# Altium PCB PCB1.PcbDoc (part 1 of 2)
Units mil, origin at the board's own origin, x right, y up, seen from the top; angles counter-clockwise.
Board outline 3865 x 2500 mil, 4 copper layers (Top Layer, GND, Power, Bottom Layer), stack 23.756 mil thick; 61 components, 57 nets, 224 pads, 39 vias.
Unrouted connection lines stored in the file: 58.
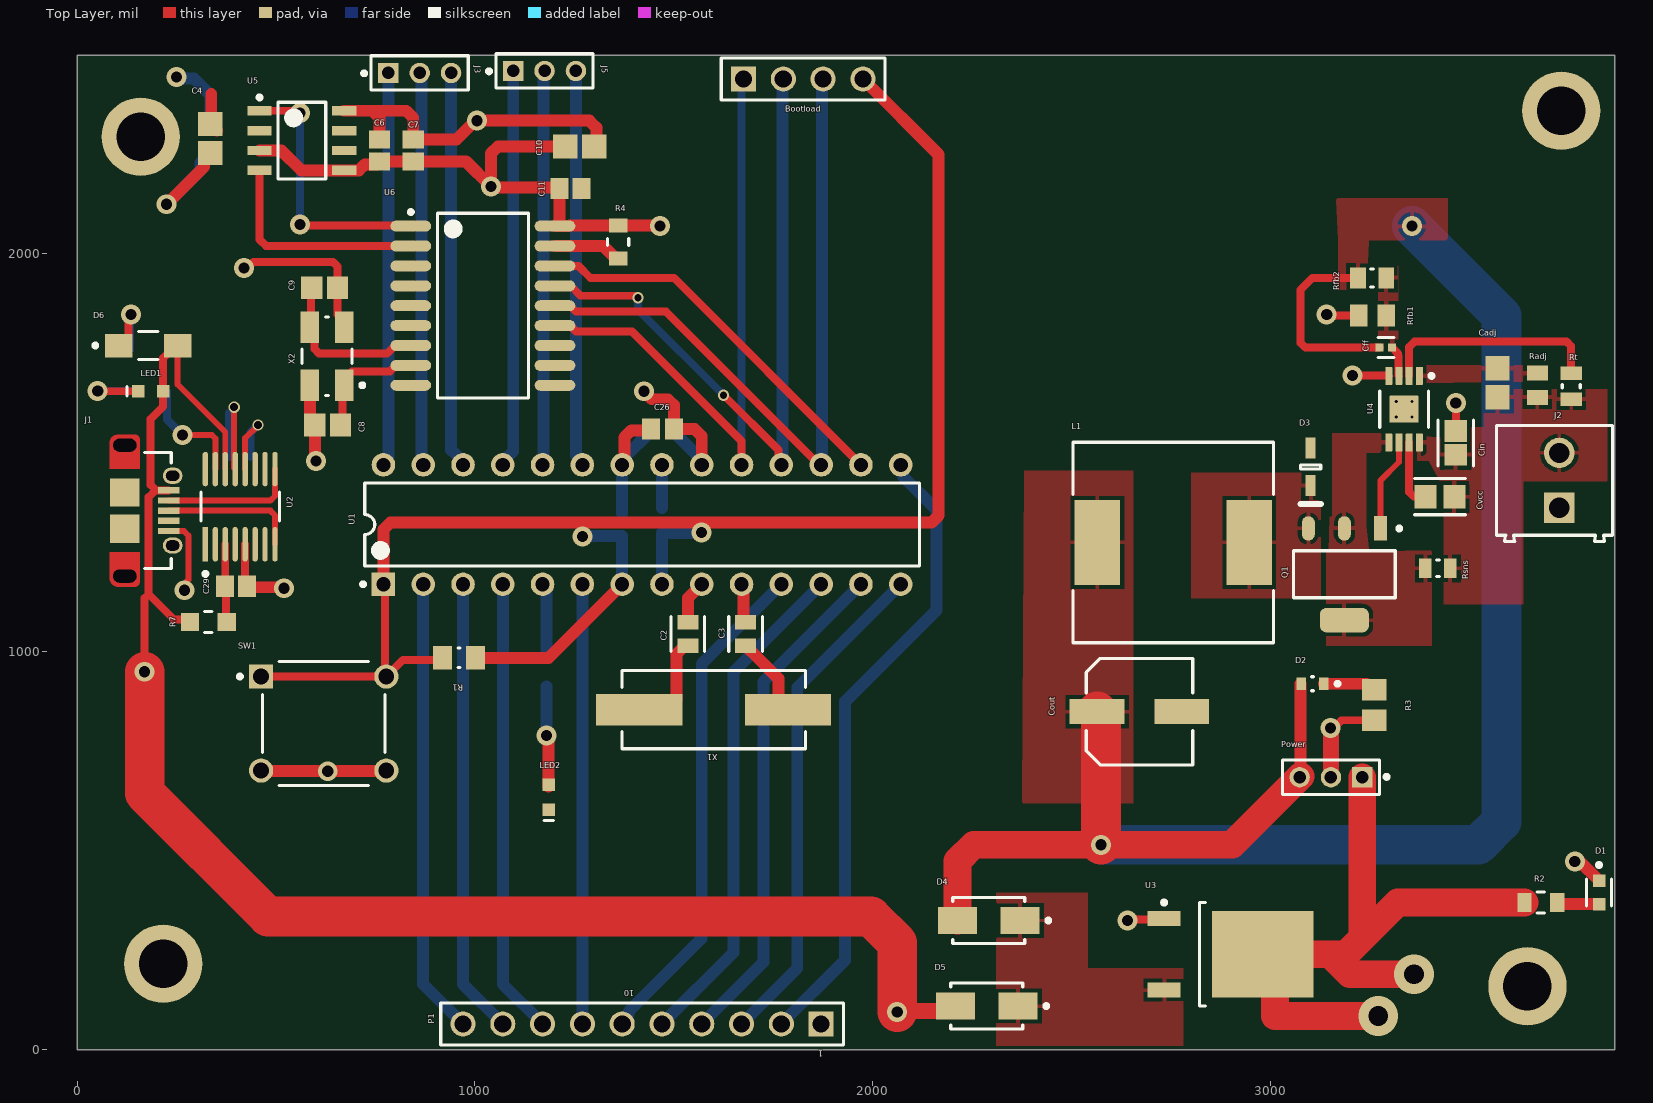
[diagram p0: Top Layer view]
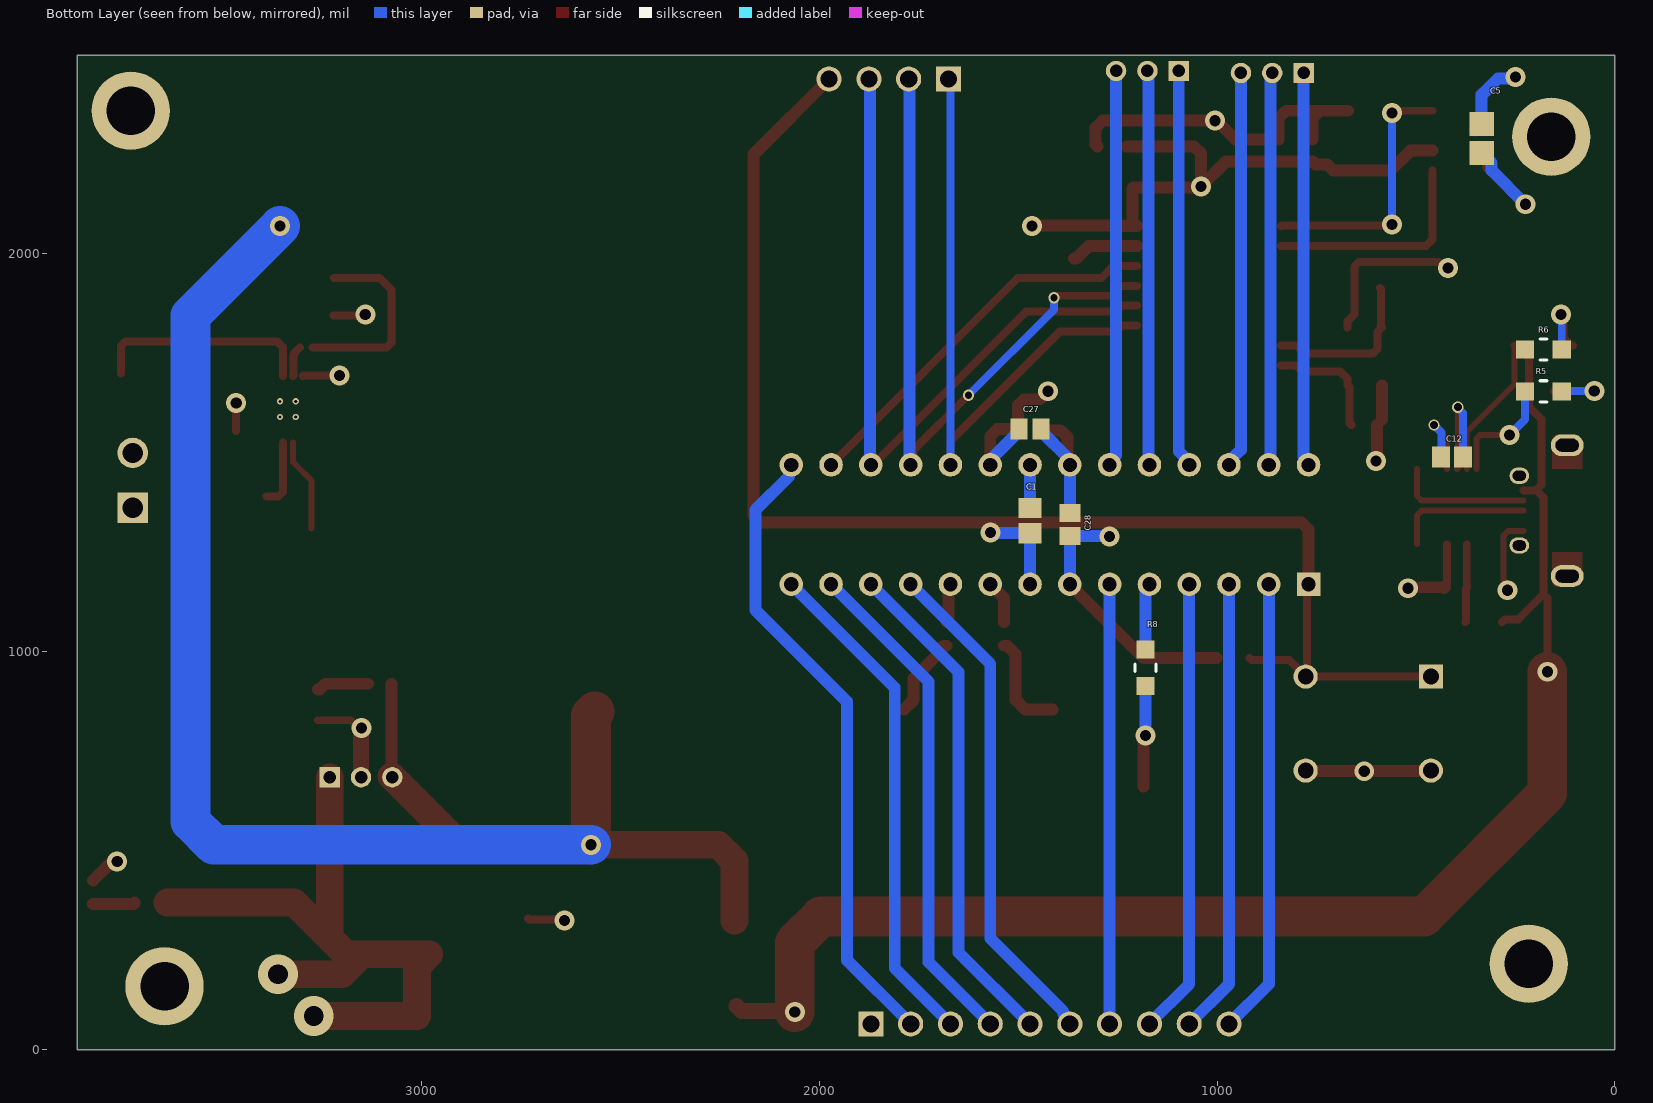
[diagram p1: Bottom Layer view, seen from below]
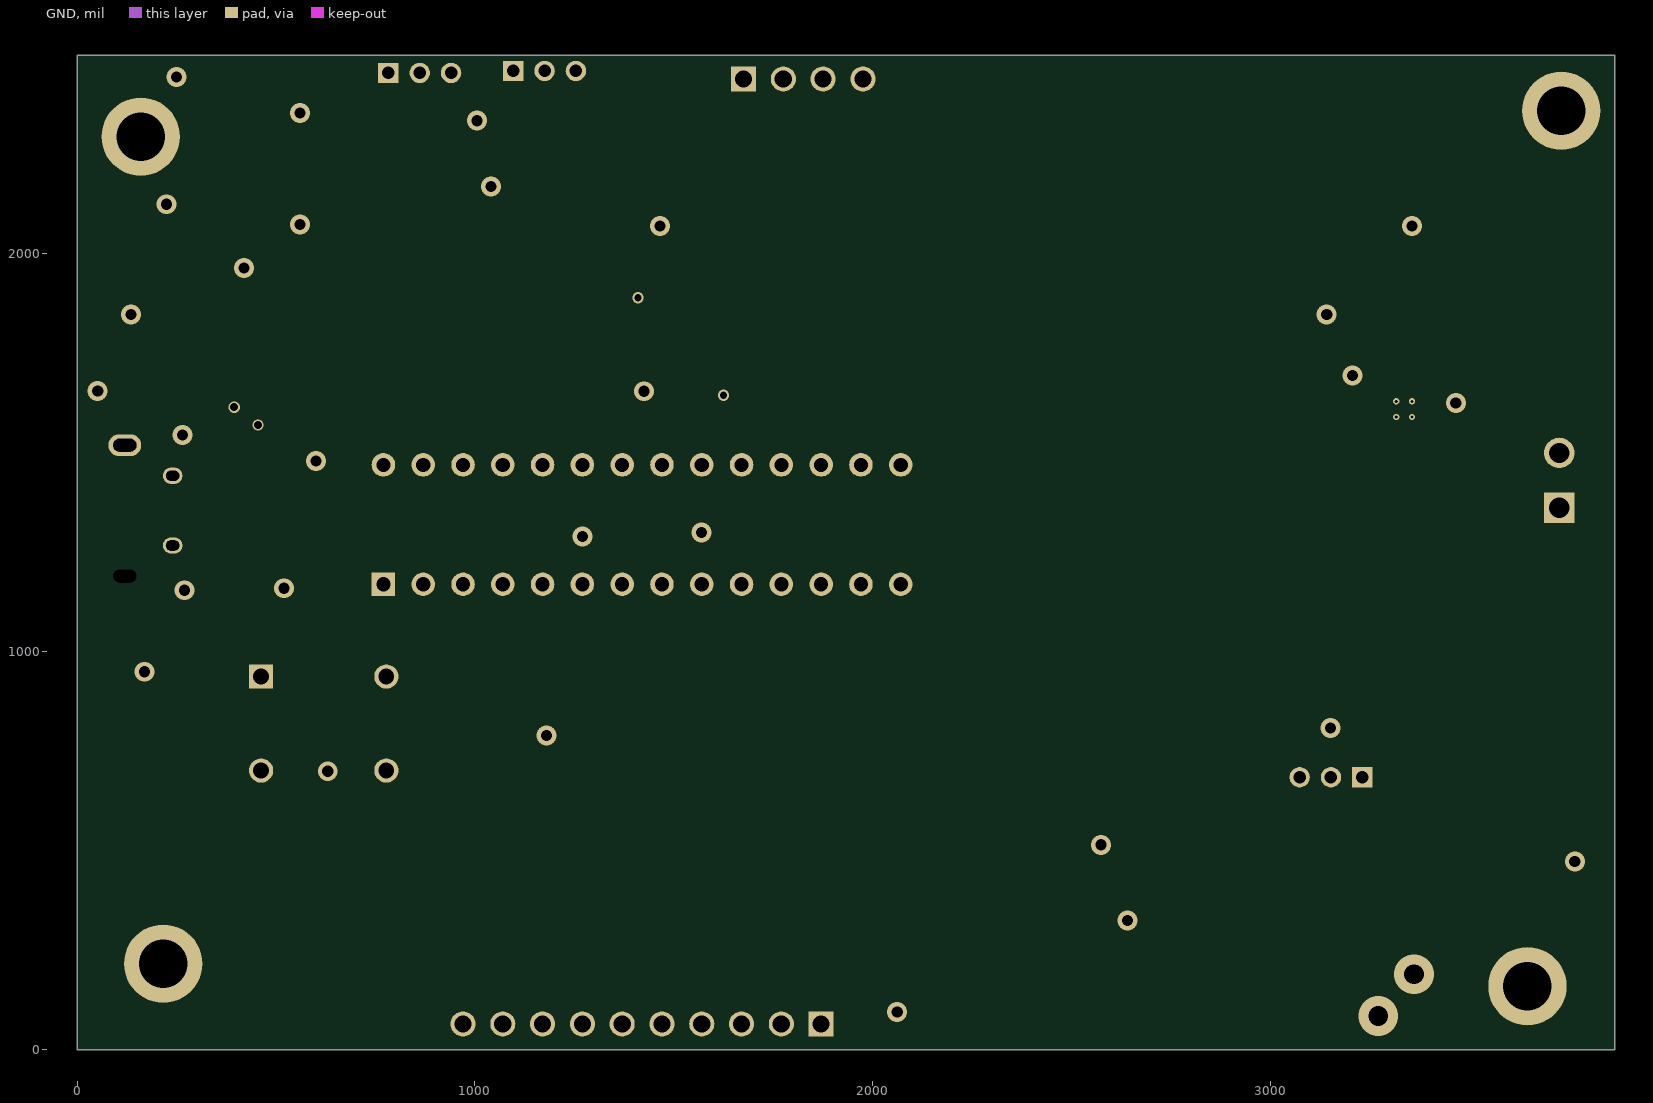
[diagram p2: GND]
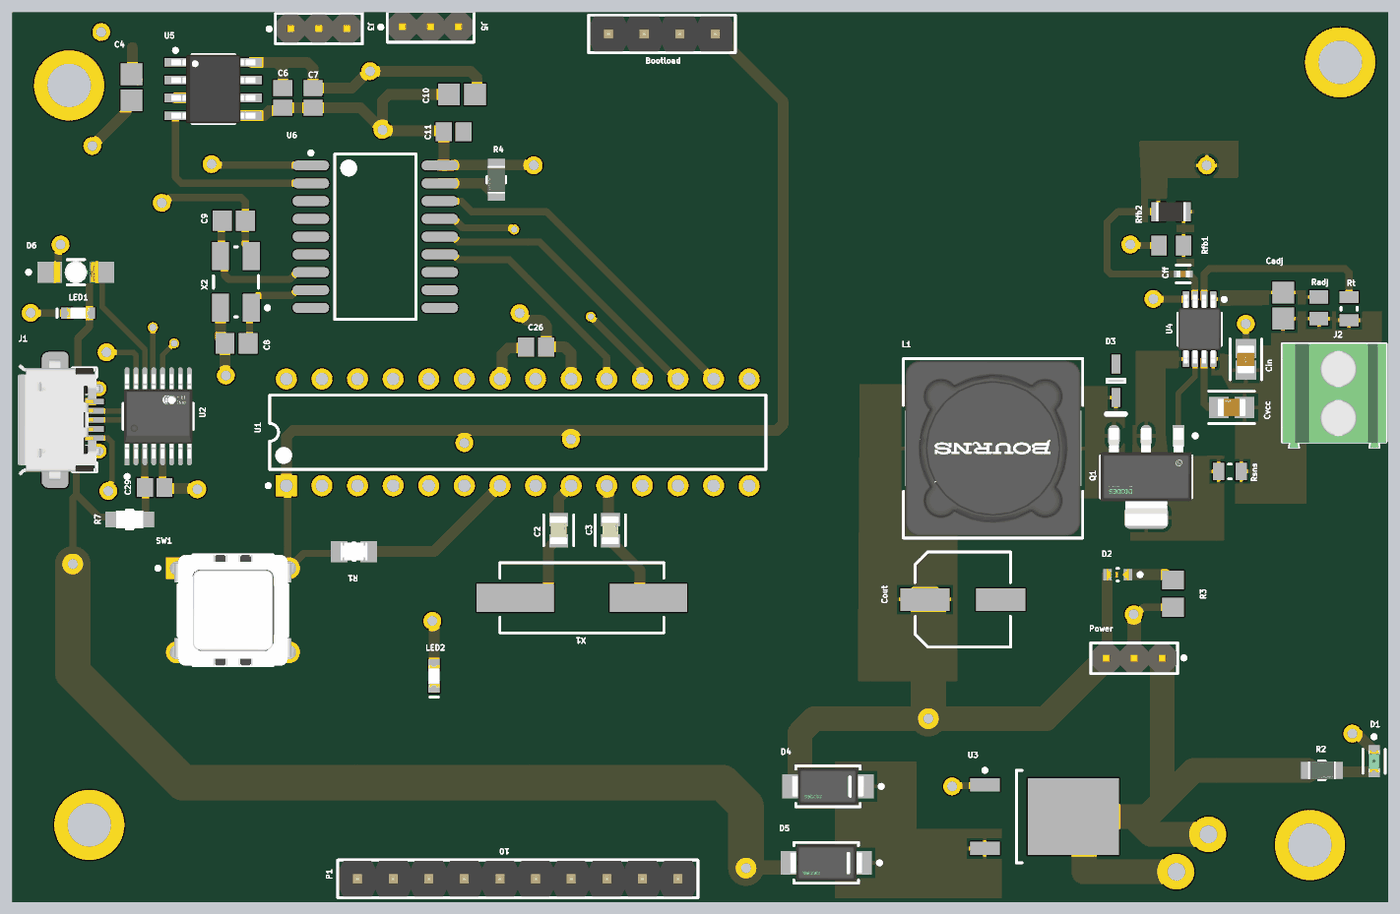
[diagram p3: 3D render of the assembled board from above, using the file's embedded part models]

## Layer stack, top to bottom
Top Solder: solder mask 0.4, Solder Resist, Dk 3.5
Top Layer: signal copper 1.4
Dielectric 2: prepreg 2.8, PP-006, Dk 4.1
GND: signal copper 1.378
Dielectric 1: dielectric 12.6, FR-4, Dk 4.8
Power: signal copper 1.378
Dielectric 3: prepreg 2.8, PP-006, Dk 4.1
Bottom Layer: signal copper 1.4
Bottom Solder: solder mask 0.4, Solder Resist, Dk 3.5

## Board outline
0,0 3865,0 3865,2500 0,2500

## Design rules (kind name [scope] priority, off if disabled: settings)
Clearance [All] p1: gap=10 ignorepadtopadclearanceinfootprint=FALSE except(0: Arc-Hole Track-Hole SMDPad-Hole THPad-Hole Via-Hole Fill-Hole Poly-Hole Region-Hole Text-Hole)
PolygonConnect [All] p1: connectstyle=Relief reliefconductorwidth=10 reliefentries=4 polygonreliefangle="90 Angle" airgapwidth=10
RoomDefinition "Power Delivery" [InComponentClass('Power Delivery')] p1: confinementstyle=ConfineIn formatcopy=TRUE lockcomponents=FALSE outline 4919.57,-1000 4919.57,4775 4289.57,4775 4289.57,-1000
RoomDefinition Peripherals [InComponentClass('Peripherals')] p2: confinementstyle=ConfineIn formatcopy=TRUE lockcomponents=FALSE outline 10356.42,1370 13636.42,1370 13636.42,1990 10356.42,1990
RoomDefinition Microcontroller [InComponentClass('Microcontroller')] p3: confinementstyle=ConfineIn formatcopy=TRUE lockcomponents=FALSE outline 7111.1,-1000 13551.1,-1000 13551.1,530 7111.1,530
RoutingVias [All] p1: holewidth=28 width=50 viastyle="Through Hole" minholewidth=28 minwidth=50 maxholewidth=28 maxwidth=50
SolderMaskExpansion [All] p1: expansion=4 istentingtop=FALSE
Width [All] p1: maxlimit=100 minlimit=10 preferedwidth=20 minimp=50.000000 maximp=50.000000 favimp=50.000000
30 further rules are at their usual default settings.

## Classes and differential pairs
component class "Power Delivery": Cadj Cff Cin Cout Cvcc D1 D2 D3 D4 D5 L1 Power Q1 R2 R3 Radj Rfb1 Rfb2 Rsns Rt U3 U4
component class Peripherals: C4 C5 C6 C7 C8 C9 C10 C11 J4 R4 U5 U6 X2
component class Microcontroller: Bootload C1 C2 C3 C12 C26 C27 C28 C29 D6 J1 J2 J3 J5 LED1 LED2 P1 R1 R5 R6 R7 R8 SW1 U1 U2 X1

## Components (designator, comment, footprint, x,y, rotation, side; value= is the part's Value field where it differs from the comment)
Bootload "61300411121" 61300411121 1825,2440 r0 top
C1 "100nF" CAPC2013X140X50NL20T25 1470,1330 r90 bottom
C2 "22pF" FP-C0805C-DN-MFG 1535,1045 r270 top value="22 pF"
C3 "22pF" FP-C0805C-DN-MFG 1680,1045 r270 top value="22 pF"
C4 "100nF" CAPC2013X94X50ML20T25 335,2290 r270 top
C5 "100nF" CAPC2013X94X50ML20T25 335,2290 r270 bottom
C6 "10uF" CAPC2013X115X51LL20T26 760,2260 r270 top
C7 "10uF" CAPC2013X115X51LL20T26 845,2260 r270 top
C8 "15pF" CAPC2013X94X50NL20T25 630,1570 r180 top
C9 "15pF" CAPC2013X94X50NL20T25 622.52,1915 r180 top
C10 "100nF" CAPC2013X94X50ML20T25 1263.58,2270 r180 top
C11 "10uF" CAPC2013X115X51LL20T26 1240,2165 r180 top
C12 "10uF" CAPC2013X115X51LL20T26 410,1490 r0 bottom
C26 "1uF" CAPC2013X94X50LL20T25 1471.46,1560 r0 top
C27 "4.7uF" CAPC2013X140X50LL20T25 1470,1560 r0 bottom
C28 "1uF" CAPC2013X94X50LL20T25 1370,1320 r270 bottom
C29 "10uF" CAPC2013X115X51LL20T26 400,1165 r180 top
Cadj "1nF, 50V" CAPC2013X94X50ML20T25 3570,1676.42 r90 top
Cff "1.1nF, 0402" FP-C0402-BB-MFG 3289.25,1765 r0 top value="1,100 pF"
Cin "2.2uF, 35V" FP-C2012-125-0_2-IPC_B 3465,1525.08 r90 top
Cout "33uF" NIC-CAPA2-6.3X5.8_V 2670,850 r0 top
Cvcc "470nF, 50V" FP-GCM21B-0_15-IPC_A 3425,1390 r180 top
D1 "Blue" FP-LTST-C191TBKT-MFG 3825,395.47 r270 top
D2 "Green" FP-6_541-5056_01-4-MFG 3105,920 r180 top
D3 "750mV" DIOD-SOD-323-2_V 3100,1465 r270 top
D4 "B330A-13-F" FP-SMA-MFG 2291.26,325 r180 top value=200pF
D5 "B330A-13-F" FP-SMA-MFG 2286.26,110 r180 top value=200pF
D6 "Green" FP-APTD3216CGCK-MFG 178.82,1770 r0 top
J1 "Micro-USB" 629105150921 120,1355 r270 top
J2 "" 691214110002 3713.19,1431.1 r90 top
J3 "951103-8622-AR" FP-951103-8622-AR-MFG#1 861.26,2455 r0 top
J4 "" 691214110002 13146.42,1730 r0 top
J5 "951103-8622-AR" FP-951103-8622-AR-MFG#2 1175,2460 r0 top
L1 "27uH, Shielded" FP-SRR1260-MFG 2755,1275 r180 top value=27uH
LED1 "Red" 0603_A 185,1655 r0 top
LED2 "Red" 0603_A 1185,635 r90 top
P1 "61301011121" 61301011121 1420,65 r180 top
Power "951103-8622-AR" FP-951103-8622-AR-MFG#2 3151.26,685 r180 top
Q1 "60V, 3A" FP-SOT223-IPC_C 3185,1195 r270 top
R1 "10K" FP-CRCW0805-e3-IPC_A 960,985 r0 top
R2 "120" FP-AC0805-MFG 3678.66,370 r0 top value=120Ω
R3 "180" RESC2013X70X40ML20T20 3260,866.61 r270 top
R4 "10k" FP-AC0805-MFG 1360,2030 r270 top value=10KΩ
R5 "180" FP-CR0805-MFG 180,1655 r180 bottom
R6 "180" FP-CR0805-MFG 180,1760 r180 bottom
R7 "180" FP-CR0805-MFG 330,1075 r180 top
R8 "180" FP-CR0805-MFG 1180,960 r270 bottom
Radj "665" RESC2013X70X40LL20T20 3670,1670 r270 top
Rfb1 "3.32k" RESC2013X55X40NL15T20 3255.55,1845 r0 top
Rfb2 "10k" RESC2013X60X35NL10T20 3254.57,1940 r180 top
Rsns "10m" RESC2013X60X35LL10T20 3420,1210 r0 top
Rt "44.2k" RESC2013X50X30LL20T20 3755,1667.48 r270 top
SW1 "Reset" FP-ESE-20C421-MFG 620,820 r0 top
U1 "ATmega328-PU" 28P3 1420,1320 r90 top
U2 "FT230XS-R" FP-SSOP-16-MFG 410,1365 r90 top
U3 "" TO-252_N 2899.29,240 r0 top
U4 "LM25085MYE/NOPB" DGN0008A_L 3335,1610 r270 top
U5 "MCP2551-I/SN" MCHP-SN8_V 565,2285 r0 top
U6 "MCP2515-E/SO" SOIC-SO18_M 1020,1870 r0 top
X1 "16MHz" FOX-FOXSDLF160-20_V 1600,855 r180 top
X2 "20MHz" TXC-7B-4_V 628.31,1742.83 r90 top

## Footprints (in the part's own frame and the unit in brackets; to place one, negate y for a bottom-side part, rotate by r counter-clockwise, add the part's x,y. Pads: shape width x height; smd on the part's side, far side on the other; paste and mask are expansions set on the pad)
28P3 [mm] "28-Pin Plastic Dual In-Line Package (PDIP)"
  rect 1.5x1.5 hole 0.9: 1(-3.81,16.51)
  round 1.5 hole 0.9: 2(-3.81,13.97) 3(-3.81,11.43) 4(-3.81,8.89) 5(-3.81,6.35) 6(-3.81,3.81) 7(-3.81,1.27) 8(-3.81,-1.27) 9(-3.81,-3.81) 10(-3.81,-6.35) 11(-3.81,-8.89) 12(-3.81,-11.43) 13(-3.81,-13.97) 14(-3.81,-16.51) 15(3.81,-16.51) 16(3.81,-13.97) 17(3.81,-11.43) 18(3.81,-8.89) 19(3.81,-6.35) 20(3.81,-3.81) 21(3.81,-1.27) 22(3.81,1.27) 23(3.81,3.81) 24(3.81,6.35) 25(3.81,8.89) 26(3.81,11.43) 27(3.81,13.97) 28(3.81,16.51)
  silkscreen extent -3.93,-17.7 2.65,17.93, body extent -3.6,-17.65 3.6,17.65, height 4.58
0603_A [mm] "Chip LED, 2-Leads, Body 1.6x0.8mm, IPC Medium Density"
  rect 0.8x0.8 smd: 1(-0.8,0) 2(0.8,0)
  silkscreen extent -1.5,-0.3 -1.5,0.3, body extent -0.8,-0.4 0.8,0.4, height 0.7
61300411121 [mm] "Pin Header, pitch 2.54 mm, THT, Vertical, single row, 4p"
  rect 1.6x1.6 hole 1.1: 1(-3.81,0)
  round 1.6 hole 1.1: 2(-1.27,0) 3(1.27,0) 4(3.81,0)
  silkscreen extent -5.23,-1.35 5.23,1.35, body extent -5.08,-1.27 5.08,1.27, height 8.57
61301011121 [mm] "Pin Header, pitch 2.54 mm, THT, Vertical, single row, 10p"
  rect 1.6x1.6 hole 1.1: 1(-11.43,0)
  round 1.6 hole 1.1: 2(-8.89,0) 3(-6.35,0) 4(-3.81,0) 5(-1.27,0) 6(1.27,0) 7(3.81,0) 8(6.35,0) 9(8.89,0) 10(11.43,0)
  silkscreen extent -12.85,-1.35 12.85,1.35, body extent -12.7,-1.27 12.7,1.27, height 8.57
629105150921 [mm] "Micro USB 2.0 Type AB Horizontal"
  rect 0.4x1.35 smd: 1(-1.3,2.805) 2(-0.65,2.805) 3(0,2.805) 4(0.65,2.805) 5(1.3,2.805)
  round 0 / inner oval 1.4x2.1 / far side oval 1.4x2.1 hole 0.825 slot 1.5 at 90 deg mask+0.102: Shell(-4.175,0)
  oval 1.05x1.25 hole 0.65 slot 0.85 at 90 deg: Shell(-2.225,3.055) Shell(2.225,3.055)
  rect 1.8x1.9 smd: Shell(-1.15,0) Shell(1.15,0)
  round 0 / inner round 0 / far side oval 1.4x2.1 hole 0.825 slot 1.5 at 90 deg mask+0.102: Shell(4.175,0)
  Top Layer region: 4.353,-0.95 4.544,-0.912 4.706,-0.804 4.814,-0.641 4.852,-0.45 4.852,-0.45 4.852,0.65 4.83,0.765 4.765,0.862 4.667,0.927 4.553,0.95 4.553,0.95 2.668,0.95 2.668,-0.95
  Top Layer region: -4.353,-0.95 -4.544,-0.912 -4.706,-0.804 -4.814,-0.641 -4.852,-0.45 -4.852,-0.45 -4.852,0.65 -4.83,0.765 -4.765,0.862 -4.667,0.927 -4.553,0.95 -4.553,0.95 -2.668,0.95 -2.668,-0.95
  silkscreen extent -3.7,1.25 3.7,2.97, body extent -4.3,-2.64 4.3,3.23, height 2.76
691214110002 [mm] "3.50 mm Horizontal Entry Modular, 2p"
  rect 1.95x1.95 hole 1.3: 1(-1.75,-0.3)
  round 1.95 hole 1.3: 2(1.75,-0.3)
  silkscreen extent -3.9,-3.7 3.5,3.7, body extent -3.95,-3.7 3.5,3.7, height 8.55
CAPC2013X94X50LL20T25 [mm] "Chip Capacitor, 2-Leads, Body 2.01x1.25mm, IPC High Density"
  rect 1.15x1.35 smd: 1(-0.725,0) 2(0.725,0)
  body extent -1.1,-0.72 1.1,0.72, height 0.94
CAPC2013X94X50ML20T25 [mm] "Chip Capacitor, 2-Leads, Body 2.01x1.25mm, IPC Low Density"
  rect 1.55x1.55 smd: 1(-0.925,0) 2(0.925,0)
  body extent -1.1,-0.72 1.11,0.72, height 0.94
CAPC2013X94X50NL20T25 [mm] "Chip Capacitor, 2-Leads, Body 2.01x1.25mm, IPC Medium Density"
  rect 1.35x1.45 smd: 1(-0.825,0) 2(0.825,0)
  body extent -1.1,-0.72 1.11,0.72, height 0.94
CAPC2013X115X51LL20T26 [mm] "Chip Capacitor, 2-Leads, Body 2.01x1.25mm, IPC High Density"
  rect 1.15x1.35 smd: 1(-0.7,0) 2(0.7,0)
  body extent -1.11,-0.72 1.1,0.72, height 1.15
CAPC2013X140X50LL20T25 [mm] "Chip Capacitor, 2-Leads, Body 2.00x1.25mm, IPC High Density"
  rect 1.1x1.35 smd: 1(-0.7,0) 2(0.7,0)
  body extent -1.1,-0.72 1.1,0.72, height 1.4
CAPC2013X140X50NL20T25 [mm] "Chip Capacitor, 2-Leads, Body 2.00x1.25mm, IPC Medium Density"
  rect 1.3x1.45 smd: 1(-0.8,0) 2(0.8,0)
  body extent -1.1,-0.72 1.1,0.72, height 1.4
DGN0008A_L [mm] "TSOP, 8-Leads, Body 3.1x3.1mm, Pitch 0.65mm, Thermal Pad 1.85x1.73mm, IPC High Density"
  rrect22% 1.15x0.45 smd: 1(-2.125,0.975) 2(-2.125,0.325) 3(-2.125,-0.325) 4(-2.125,-0.975) 5(2.125,-0.975) 6(2.125,-0.325) 7(2.125,0.325) 8(2.125,0.975)
  rrect6% 1.73x1.85 smd: 9(0,0)
  silkscreen extent -2.25,-1.55 1.15,1.88, body extent -2.45,-1.5 2.45,1.5, height 0.94
DIOD-SOD-323-2_V [mm] "SOD323, 2-Leads, Body 1.7x1.3mm"
  rect 1.35x0.65 smd: 1(-1.2,0) 2(1.2,0)
  silkscreen extent -0.13,-0.65 2.37,0.65, body extent -0.85,-0.65 0.85,0.65, height 1.17
FOX-FOXSDLF160-20_V [mm] "SMD, 2-Leads, Body 5x11.7mm, Height 4.5mm"
  rect 5.5x2 smd: 1(-4.75,0) 2(4.75,0)
  silkscreen extent -5.85,-2.5 5.85,2.5, body extent -5.85,-2.5 5.85,2.5, height 4.5
FP-6_541-5056_01-4-MFG [mm]
  rect 0.6x0.8 smd paste+0 mask+0: 1(-0.725,0) 2(0.725,0)
  silkscreen extent -1.73,-0.45 0.05,0.45, body extent -1.12,-0.55 1.12,0.55, height 0.25
FP-951103-8622-AR-MFG#1 [mm]
  rect 1.3x1.3 hole 0.8: 1(-2,0)
  round 1.3 hole 0.8 paste-1000 mask+0: 2(0,0) 3(2,0)
  silkscreen extent -3.67,-1.1 3.1,1.1, body extent -3.2,-1.2 3.2,1.2, height 0.25
FP-951103-8622-AR-MFG#2 [mm]
  rect 1.3x1.3 hole 0.8 paste-1000 mask+0: 1(-2,0)
  round 1.3 hole 0.8 paste-1000 mask+0: 2(0,0) 3(2,0)
  silkscreen extent -3.67,-1.1 3.1,1.1, body extent -3.2,-1.2 3.2,1.2, height 0.25
FP-AC0805-MFG [mm]
  rect 0.9x1.2 smd paste+0 mask+0: 1(-1.05,0) 2(1.05,0)
  silkscreen extent -0.23,-0.67 0.23,0.67, body extent -1.6,-0.77 1.6,0.77, height 0.25
FP-APTD3216CGCK-MFG [mm]
  rect 1.75x1.5 smd paste+0 mask+0: 1(-1.875,0) 2(1.875,0)
  silkscreen extent -3.5,-0.9 0.63,0.9, body extent -2.85,-1 2.85,1, height 0.25
FP-C0402-BB-MFG [mm]
  rect 0.52x0.52 smd paste+0 mask+0: 1(-0.4,0) 2(0.4,0)
  silkscreen extent -0.5,-0.64 0.5,0.64, body extent -0.8,-0.4 0.8,0.4, height 0.25
FP-C0805C-DN-MFG [mm]
  rect 0.95x1.35 smd paste+0 mask+0: 1(-0.75,0) 2(0.75,0)
  silkscreen extent -1.1,-1.07 1.1,1.07, body extent -1.4,-0.85 1.4,0.85, height 0.25
FP-C2012-125-0_2-IPC_B [mil]
  rect 54.25x57.33 smd paste+0 mask+0: 1(-30.08,0) 2(30.08,0)
  silkscreen extent -57,-44 57,44, body extent -67,-39 67,39, height 10
FP-CR0805-MFG [mm]
  rect 1.15x1.15 smd paste+0 mask+0: 1(-1.175,0) 2(1.175,0)
  silkscreen extent -0.23,-0.67 0.23,0.67, body extent -1,-0.63 1,0.62, height 0.6
FP-CRCW0805-e3-IPC_A [mil]
  rect 47.5x59.38 smd paste+0 mask+0: 1(-41.37,0) 2(41.37,0)
  silkscreen extent -3,-25 3,25, body extent -39,-25 39,25, height 20
FP-ESE-20C421-MFG [mm]
  rect 1.55x1.55 hole 1 paste-1000 mask+0: a(-4,3)
  round 1.55 hole 1 paste-1000 mask+0: b(-4,-3) c(4,3) d(4,-3)
  silkscreen extent -5.47,-3.95 3.9,3.95, body extent -4.87,-4.05 4.87,4.05, height 0.25
FP-GCM21B-0_15-IPC_A [mil]
  rect 55.34x59.38 smd paste+0 mask+0: 1(-36.47,0) 2(36.47,0)
  silkscreen extent -64,-45 64,45, body extent -84,-49 84,49, height 10
FP-LTST-C191TBKT-MFG [mm]
  rect 0.8x0.8 smd paste+0 mask+0: 1(-0.75,0) 2(0.75,0)
  silkscreen extent -1.87,-0.8 0.85,0.8, body extent -1.25,-0.55 1.25,0.55, height 0.25
FP-SMA-MFG [mm]
  rect 2.5x1.7 smd paste+0 mask+0: 1(-2,0) 2(2,0)
  silkscreen extent -3.93,-1.46 2.3,1.46, body extent -3.35,-1.56 3.35,1.56, height 0.25
FP-SOT223-IPC_C [mm]
  rect 1.56x0.832 smd paste+0 mask+0: 1(-2.926,2.3)
  rrect100% 1.56x0.832 smd paste+0 mask+0: 2(-2.926,0) 3(-2.926,-2.3)
  rrect53% 1.56x3.132 smd paste+0 mask+0: 4(2.926,0)
  silkscreen extent -3.05,-3.25 1.5,3.63, body extent -3.81,-3.35 3.81,3.35, height 0.25
FP-SRR1260-MFG [mm]
  rect 2.9x5.4 smd paste+0 mask+0: 1(-4.85,0) 2(4.85,0)
  silkscreen extent -6.4,-6.4 6.4,6.4, body extent -6.5,-6.5 6.5,6.5, height 0.25
FP-SSOP-16-MFG [mm]
  rect 2.2x0.345 smd paste+0 mask+0: 1(-2.4,2.222)
  rrect100% 2.2x0.345 smd paste+0 mask+0: 2(-2.4,1.587) 3(-2.4,0.952) 4(-2.4,0.317) 5(-2.4,-0.318) 6(-2.4,-0.953) 7(-2.4,-1.588) 8(-2.4,-2.222) 9(2.4,-2.222) 10(2.4,-1.587) 11(2.4,-0.952) 12(2.4,-0.317) 13(2.4,0.318) 14(2.4,0.953) 15(2.4,1.588) 16(2.4,2.222)
  silkscreen extent -4.42,-2.5 0.92,2.5, body extent -3.6,-2.75 3.6,2.75, height 0.25
MCHP-SN8_V [mm] "SOIC, 8-Leads, Body 4.9x3.9mm, Pitch 1.27mm"
  rect 1.55x0.6 smd: 1(-2.7,1.905) 2(-2.7,0.635) 3(-2.7,-0.635) 4(-2.7,-1.905) 5(2.7,-1.905) 6(2.7,-0.635) 7(2.7,0.635) 8(2.7,1.905)
  silkscreen extent -2.82,-2.45 1.53,2.88, body extent -3,-2.45 3,2.45, height 1.75
NIC-CAPA2-6.3X5.8_V [mm] "Aluminum Electrolytic Capacitor, Diameter 6.3mm, Height 6.1mm, Pitch 5.4mm"
  rect 3.5x1.6 smd: 1(-2.7,0) 2(2.7,0)
  silkscreen extent -3.4,-3.4 3.4,3.4, body extent -3.14,-3.12 3.14,3.15, height 6.1
RESC2013X50X30LL20T20 [mm] "Chip Resistor, 2-Leads, Body 2.00x1.25mm, IPC High Density"
  rect 0.85x1.35 smd: 1(-0.825,0) 2(0.825,0)
  silkscreen extent -0.1,-0.58 0.1,0.58, body extent -1.1,-0.72 1.1,0.72, height 0.5
RESC2013X55X40NL15T20 [mm] "Chip Resistor, 2-Leads, Body 2.00x1.25mm, IPC Medium Density"
  rect 1.1x1.4 smd: 1(-0.875,0) 2(0.875,0)
  body extent -1.07,-0.7 1.08,0.7, height 0.55
RESC2013X60X35LL10T20 [mm] "Chip Resistor, 2-Leads, Body 2.00x1.25mm, IPC High Density"
  rect 0.8x1.25 smd: 1(-0.8,0) 2(0.8,0)
  silkscreen extent -0.1,-0.53 0.1,0.53, body extent -1.05,-0.67 1.05,0.67, height 0.6
RESC2013X60X35NL10T20 [mm] "Chip Resistor, 2-Leads, Body 2.1x1.35mm, IPC Medium Density"
  rect 1x1.35 smd: 1(-0.9,0) 2(0.9,0)
  silkscreen extent -0.1,-0.58 0.1,0.58, body extent -1.05,-0.68 1.05,0.67, height 0.6
RESC2013X70X40LL20T20 [mm] "Chip Resistor, 2-Leads, Body 2.00x1.25mm, IPC High Density"
  rect 0.95x1.35 smd: 1(-0.775,0) 2(0.775,0)
  body extent -1.1,-0.72 1.1,0.72, height 0.7
RESC2013X70X40ML20T20 [mm] "Chip Resistor, 2-Leads, Body 2.00x1.25mm, IPC Low Density"
  rect 1.35x1.55 smd: 1(-0.975,0) 2(0.975,0)
  body extent -1.1,-0.72 1.1,0.72, height 0.7
SOIC-SO18_M [mm] "SOIC, 18-Leads, Body 11.6x7.5mm, Pitch 1.27mm, IPC Low Density"
  oval 2.6x0.7 smd: 1(-4.6,5.08) 2(-4.6,3.81) 3(-4.6,2.54) 4(-4.6,1.27) 5(-4.6,0) 6(-4.6,-1.27) 7(-4.6,-2.54) 8(-4.6,-3.81) 9(-4.6,-5.08) 10(4.6,-5.08) 11(4.6,-3.81) 12(4.6,-2.54) 13(4.6,-1.27) 14(4.6,0) 15(4.6,1.27) 16(4.6,2.54) 17(4.6,3.81) 18(4.6,5.08)
  silkscreen extent -4.72,-5.9 2.9,6.1, body extent -3.8,-5.87 3.8,5.87, height 2.65
TO-252_N [mm] "D-PAK, 4-Leads, Body 6.1x6.5mm, Pitch 2.28mm, Lead Span 9.7mm, IPC Medium Density"
  rect 2.1x0.95 smd: 1(-4.25,2.28) 3(-4.25,-2.28)
  rect 6.5x5.5 smd: 4(2.05,0)
  silkscreen extent -4.37,-3.3 -1.6,3.43, body extent -2,-3.3 4.2,3.3, height 2.4
TXC-7B-4_V [mm] "SMD, 4-Leads, Body 5x3.2mm, Pitch 3.7mm"
  rect 2x1.2 smd: 1(-1.85,-1.1) 2(1.85,-1.1) 3(1.85,1.1) 4(-1.85,1.1)
  silkscreen extent -2.5,-2.37 2.5,1.6, body extent -2.5,-1.6 2.5,1.6, height 1.05

## Part data
Bootload: library part CMP-1502-01064-1, "THT Vertical Pin Header WR-PHD, Pitch 2.54 mm, Single Row, 4 pins", Contact Resistance=20mOhm, Manufacturer="Wurth Elektronik", Operating Temperature=-40to105degC, Rated Current=3A, Withstanding Voltage=500VAC, Working Voltage=250VAC, Datasheet URL=https://katalog.we-online.de/em/datasheet/6130xx11121.pdf, Gender=Male, Manufacturer URL=http://www.we-online.de, Mounting Technology=THT, Orientation=Vertical, Package Reference=61300411121, Packaging=Bag, Part Number=61300411121, Pin Number=4, Pitch=2.54mm, Publisher=WurthElektronik, Row Number=Single
C1: library part CMP-2007-04629-1, Manufacturer="AVX Interconnect / Elco", Part Number=08055C104K4Z2A
C2 C3: library part CMP-2007-00448-2, "CAP CER 22PF 100V 5% NP0 0805", Capacitance="22 pF", Manufacturer=KEMET, Manufacturer Part Number=C0805C220J1GACTU, Package=C0805C-DN, Temperature="-55°C to +125°C", Temperature Characteristic=C0G, Temperature Coefficient=30ppm/°C, Temperature Range High=+125°C, Temperature Range Low=-55°C, Tolerance=0.05, Voltage Rating="100 V", Automotive=No, Category=Cap, ComponentLink2Description=Datasheet, ComponentLink2URL=https://content.kemet.com/datasheets/KEM_C1003_C0G_SMD.pdf, Device Class L1="Passive Components", Device Class L2=Capacitors, Device Class L3="Ceramic Capacitors", Digikey Description="CAP CER 22PF 100V 5% NP0 0805", Height=0.88mm, Ipc Land Pattern Name=CAPC200125X78, Lead Free=Yes, Material=Ceramic, Mouser Description="Multilayer Ceramic Capacitor, C Series, 22 Pf, - 5%, C0g / Np0, 100 V, 0805 [2012 Metric] Rohs Compliant: Yes", Octopart=https://octopart.com/c0805c220j1gactu-kemet-3791395, RoHS=TRUE
C4 C5 C10: library part CMP-1036-04427-2, Manufacturer="AVX Interconnect / Elco", Part Number=08051C104JAT2A
C6 C7 C11 C12 C29: library part CMP-2007-04884-1, Manufacturer="AVX Interconnect / Elco", Part Number=08056C106KAT2A
C8 C9: library part CMP-1036-01049-2, Manufacturer="AVX Interconnect / Elco", Part Number=08051A150FAT2A
C26 C28: library part CMP-2007-04237-1, Manufacturer="AVX Interconnect / Elco", Part Number=08053C105K4T2A
C27: library part CMP-1036-04896-2, Manufacturer="AVX Interconnect / Elco", Part Number=08053D475MAT2A
Cadj: library part CMP-2007-04448-1, Manufacturer="AVX Interconnect / Elco", Part Number=08055F102KAT2A
Cff: library part CMP-1034-01638-3, "CAP CER 1100PF 50V C0G/NP0 0402", Capacitance="1,100 pF", Manufacturer=Kemet, Manufacturer Part Number=C0402C112J5GACTU, Package=C0402-BB, Temperature="-55°C to +125°C", Temperature Characteristic=C0G, Temperature Coefficient=15%, Temperature Range High=+125°C, Temperature Range Low=-55°C, Tolerance=0.05, Voltage Rating="50 V", Automotive=No, Category=Cap, ComponentLink2Description=Datasheet, ComponentLink2URL=https://content.kemet.com/datasheets/KEM_C1002_X7R_SMD.pdf, Device Class L1="Passive Components", Device Class L2=Capacitors, Device Class L3="Ceramic Capacitors", Digikey Description="CAP CER 1100PF 50V C0G/NP0 0402", Height=0.55mm, Ipc Land Pattern Name=CAPC10050X50, Lead Free=Yes, Material=Ceramic, Mouser Description="Cap Ceramic 0.0011uF 50V C0G 5% SMD 0402 125°C Paper T/R", Octopart=https://octopart.com/c0402c112j5gactu-kemet-19757367, RoHS=TRUE
Cin: library part CMP-08246-002978-1, "Multilayer Ceramic Capacitors 2.2μF ±10% 35V X6S SMD 0805", Capacitance=2.2uF, Case Code (Imperial)=0805, Case Code (Metric)=2012, Dielectric=X6S, Dielectric Material=Ceramic, Max Operating Temperature=105°C, Min Operating Temperature=-55°C, Package Quantity=2000, Tolerance=10%, Voltage Rating=35V, Case/Package=0805, Height=1.25mm, Lead Free="Lead Free", Length=0.079inch, Mount="Surface Mount", Packaging="Tape and Reel", RoHS Compliant=Yes, Series=C, Termination=SMD/SMT, Thickness=0.057inch, Voltage Rating (DC)=35V, Weight=0.000194oz, Width=0.049inch
Cout: library part CMP-0687-00040-1, "Aluminum Electrolytic Capacitor, UD Series, Low Impedance, 33 uF, 16 V, + / - 20%, -55 to 105 degC, Chip Type, 6.3 x 5.8 mm D x L, Pb-Free, Reel", Manufacturer=Nichicon, PartNumber=UUD1C330MCL1GS, Rated Capacitance="33 uF", Rated Ripple Current (at 100kHz)="230 mA", Rated Voltage="16 V", Tolerance Rated Capacitance="-20 to 20%", ComponentLink1Description="Manufacturer URL", ComponentLink1URL=http://www.nichicon.co.jp/, ComponentLink2Description=Datasheet, ComponentLink2URL=http://products.nichicon.co.jp/en/pdf/XJA043/e-ud.pdf, ComponentLink3Description="Package Specification", ComponentLink3URL=http://products.nichicon.co.jp/en/pdf/XJA043/e-ud.pdf, DatasheetVersion=08/2012, Diameter="6.3 mm", Endurance Time="2000 h", Impedance="0.44 Ohm", Length="5.8 mm", Mounting Technology="Surface Mount", PackageDescription="2-Pin Surface Mount Device, Diameter 6.3 mm, Height 5.8 mm, Pitch 5.4 mm", PackageReference=CAPAE-D6.3H5.8, Packing="Dia382mm Reel", RoHS=TRUE
Cvcc: library part CMP-2007-03360-2, "Ceramic Capacitor for Automotive 470nF ±10% 50VDC X7R 0805 Embossed T/R", Capacitance=470nF, Case Code (Imperial)=0805, Case Code (Metric)=2012, Dielectric=X7R, Max Operating Temperature=125°C, Min Operating Temperature=-55°C, Package Quantity=10000, Ratings=AEC-Q200, Tolerance=10%, Voltage Rating=50V, Case/Package=0805, Depth=1.25mm, Height=1.25mm, Length=2mm, Mount="Surface Mount", Packaging="Tape and Reel", Radiation Hardening=No, Termination=SMD/SMT, Thickness=0.055inch, Voltage Rating (DC)=50V, Width=0.049inch
D1: library part CMP-22017-000008-1, "LED BLUE CLEAR CHIP SMD", Case Code (Imperial)=0603, Case Code (Metric)=1608, Forward Current=20mA, Forward Voltage=3.8V, Lens Color=Colorless, Max Operating Temperature=80°C, Max Power Dissipation=75mW, Min Operating Temperature=-20°C, Package Quantity=1, Power Dissipation=76mW, Reverse Voltage=5V, Case/Package=0603, Color=Blue, Depth=1.6mm, Dominant Wavelength=475nm, Height=0.55mm, Illumination Color=Blue, Lead Free="Lead Free", Length=0.8mm, Lens Style=Diffused, Lens Transparency=Clear, Luminous Intensity=180mcd, Mount="Surface Mount", Number of Elements=1, Number of LEDs=1, Number of Pins=2, Packaging="Tape and Reel", Radiation Hardening=No, Test Current=20mA, Viewing Angle=130°, Wavelength=468nm, Width=0.8mm
D2: library part CMP-02520-000009-1, "LED GREEN 0603 SMD", Ambient Temperature Range High=+100°C, Ambient Temperature Range Low=-40°C, Colour="Pure green", Forward Current=20mA, Forward Voltage=2.1V, Manufacturer=Vishay, Manufacturer Part Number=TLMP1100-GS08, Max Junction Temp=+120°C, Package=6.541-5056.01-4, Power Dissipation=90mW, Reverse Voltage=6V, Temperature="to +120°C", Automotive=Yes, Automotive Grade="Grade 3", Category=Diode, ComponentLink2Description=Datasheet, ComponentLink2URL=http://www.vishay.com/docs/83173/tlmb1100.pdf, Device Class L1=Optoelectronics, Device Class L2=LEDs, Device Class L3=unset, Digikey Description="LED GREEN 0603 SMD", Height=0.65mm, Lead Free=Yes, Led Orientation="Top View", Luminous Intensity=15mcd, Mouser Description="Standard LEDs - SMD Pure Green", Octopart=https://octopart.com/tlmp1100-gs08-vishay-55433993, Peak Emmision Wavelength=562nm, RoHS=TRUE, Temperature Range High=+120°C, Viewing Angle=160°, Wavelength=561nm
D3: library part CMP-2000-07037-1, "Schottky Barrier Diode, 30 V, -65 to 150 degC, 2-Pin SOD-323, RoHS, Tape and Reel", If - Forward Current=0.1A, Ifsm - Forward Surge Current=0.75A, Ir - Reverse Current=1uA, Manufacturer=DiodesIncorporated, Maximum Operating Temperature=+150C, Minimum Operating Temperature=-65C, Operating Temperature Range=-65Cto+150C, Package / Case=SOD-323, Package Description="2-Pin Small Outline Diode, Body 1.7 x 1.3 mm", Package Reference=SOD-323-2, Pd - Power Dissipation=250mW, Vf - Forward Voltage=0.8V, Vrrm - Repetitive Reverse Voltage=30V, Brand=DiodesIncorporated, Configuration=Single, Datasheet URL=http://www.diodes.com/_files/datasheets/ds30129.pdf, Datasheet Version="Rev. 10-2, 12/2009", Factory Pack Quantity=3000, Height=1mm, Length=1.8mm, Manufacturer URL=http://www.diodes.com/, Mounting Style=SMD/SMT, Mounting Technology=SurfaceMount, Packaging=Reel, Product=SchottkyDiodes, Product Category=SchottkyDiodes&Rectifiers, RoHS=True, Series=SD107, Technology=Si, Termination Style=SMD/SMT, Type=SurfaceMountSchottkyBarrierDiode, Unit Weight=0.000173oz, Width=1.4mm
D4 D5: library part CMP-2000-05896-2, "DIODE SCHOTTKY 30V 3A SMA", Capacitance=200pF, Dc Blocking Voltage=30V, Forward Current=3A, Manufacturer=Diodes, Max Junction Temp=+150°C, Max Surge Forward Current=80A, Package=SMA, Peak Reverse Current=0.5mA, Temperature="-55°C to +150°C", Temperature Range Low=-55°C, Automotive=Yes, Automotive Grade="Grade 0", Category=Diode, ComponentLink2Description=Datasheet, ComponentLink2URL=https://www.diodes.com/assets/Datasheets/ds30891.pdf, Device Class L1="Discrete Semiconductors", Device Class L2=Diodes, Device Class L3="Schottky Diodes", Digikey Description="DIODE SCHOTTKY 30V 3A SMA", Footprint Url=https://www.diodes.com/assets/Package-Files/SMA.pdf, Height=2.4mm, Lead Free=Yes, Manufacturer Part Number=B330A-13-F, Max Repetitive Reverse Voltage=30V, Mouser Description="Schottky Diodes & Rectifiers 30V 3A", Octopart=https://octopart.com/b330a-13-f-diodes+inc.-325808, Reverse Voltage=30V, RoHS=TRUE, Standoff Height=0.05mm, Temperature Range High=+150°C, Working Reverse Voltage=30V
D6: library part CMP-2000-05792-2, "LED GREEN CLEAR 2SMD", Case Code (Imperial)=1206, Case Code (Metric)=3216, Forward Current=20mA, Forward Voltage=2.1V, Lens Color=Clear, Max Operating Temperature=85°C, Min Operating Temperature=-40°C, Package Quantity=2000, Case/Package=1206, Color=Green, Dominant Wavelength=570nm, Height=1.8mm, Illumination Color=Green, Lead Free="Lead Free", Length=3.2mm, Lens Style=Clear, Luminous Intensity=300mcd, Mount="Surface Mount", Number of LEDs=1, Number of Pins=2, Packaging="Tape and Reel", Test Current=20mA, Viewing Angle=50°, Width=1.6mm
J1: library part CMP-1502-03249-1, "Micro USB 2.0 Type AB Receptacle WR-COM, Horizontal, SMT", Contact Resistance=30mOhm, Manufacturer="Wurth Elektronik", Operating Temperature=-40to85degC, Package Reference=629105150921, Rated Current=1.8A, Working Voltage=30VAC, Connector Type=MicroUSB2.0TypeAB, Datasheet URL=https://katalog.we-online.de/em/datasheet/629105150921.pdf, Gender=Receptacle, Manufacturer URL=http://www.we-online.de, Mounting Technology=SMT, Orientation=Horizontal, Packaging=TapeandReel, Part Number=629105150921, Publisher=WurthElektronik
J2 J4: library part CMP-1502-02464-1, "Serie 2141 - 3.50 mm Horizontal Entry Modular with Rising Cage Clamp WR-TBL, 2 pin", Manufacturer="Wurth Elektronik", Operating Temperature=-40to105degC, Package Reference=691214110002, Datasheet URL=http://katalog.we-online.de/em/datasheet/6912141100xx.pdf, Manufacturer URL=http://www.we-online.de, Mounting Technology=THT, Packaging=Box, Part Number=691214110002, Pin Number=2, Pitch=3.50mm, Publisher=WurthElektronik
J3 J5 Power: library part CMP-05379-000003-1, "CONN HEADER VERT 3POS 2MM", Current Rating=2A, Manufacturer=3M, Temperature="-55°C to +125°C", Temperature Range High=+125°C, Temperature Range Low=-55°C, Automotive=No, Category=Conn, ComponentLink2Description=Datasheet, ComponentLink2URL=http://multimedia.3m.com/mws/media/1400506O/3m-pin-strip-header-951-series-78-5100-2653-3.pdf, Conn Gender=Male, Conn Orientation=Straight, Contact Material=Gold,Nickel, Device Class L1=Connectors, Device Class L2="Headers and Wire Housings", Device Class L3=unset, Digikey Description="CONN HEADER VERT 3POS 2MM", Height=6.3mm, Lead Free=Yes, Manufacturer Part Number=951103-8622-AR, Mouser Description="Header; PinStrip; CopperAlloy; HighTempThermoplastic; 3Cnts; 1A; RtAngle; 951Series", Number Of Contacts=3, Number Of Rows=1, Octopart=https://octopart.com/951103-8622-ar-3m-14400669, Package=951103-8622-AR, Pitch=2mm, RoHS=TRUE
L1: library part CMP-07248-000018-1, "FIXED IND 27UH 3.6A 45 MOHM SMD", Inductance=27uH, Manufacturer=Bourns, Manufacturer Part Number=SRR1260-270M, Package=SRR1260, Rms Current=3.6A, Saturation Current=3.3A, Self Resonant Frequency=12.7MHz, Series Resistance=45mΩ, Temperature="-40°C to +125°C", Temperature Range High=+125°C, Temperature Range Low=-40°C, Test Frequency=2.52MHz, Tolerance=20%, Automotive=No, Category=Ind, ComponentLink2Description=Datasheet, ComponentLink2URL=https://www.bourns.com/docs/product-datasheets/srr1260.pdf?sfvrsn=a4409aa5_15, Composition=Wirewound, Core Material=Ferrite, Device Class L1="Passive Components", Device Class L2=Inductors, Device Class L3="Fixed Inductors", Digikey Description="FIXED IND 27UH 3.6A 45 MOHM SMD", Height=6.5mm, Lead Free=Yes, Mouser Description="Fixed Inductors 27uH 20% SMD 1260", Octopart=https://octopart.com/srr1260-270m-bourns-1930921, Q Factor=26, RoHS=TRUE
LED1 LED2: library part CMP-1426-00001-1, "SMD mono-color Chip LED, WL-SMCW, Red", Manufacturer="Wuerth Elektronik", PartNumber=150060RS75000, Color=Red, ComponentLink1Description="Manufacturer URL", ComponentLink1URL=http://www.we-online.com, ComponentLink2Description=Datasheet, ComponentLink2URL=http://katalog.we-online.com/led/datasheet/150060RS75000.pdf, PackageReference=0603_A
P1: library part CMP-1502-01082-1, "THT Vertical Pin Header WR-PHD, Pitch 2.54 mm, Single Row, 10 pins", Contact Resistance=20mOhm, Manufacturer="Wurth Elektronik", Operating Temperature=-40to105degC, Rated Current=3A, Withstanding Voltage=500VAC, Working Voltage=250VAC, Datasheet URL=https://katalog.we-online.de/em/datasheet/6130xx11121.pdf, Gender=Male, Manufacturer URL=http://www.we-online.de, Mounting Technology=THT, Orientation=Vertical, Package Reference=61301011121, Packaging=Bag, Part Number=61301011121, Pin Number=10, Pitch=2.54mm, Publisher=WurthElektronik, Row Number=Single
Q1: library part CMP-12801-000089-1, "MOSFET PCH 60V 3A SOT223", Case/Package=TO-261-4, Continuous Drain Current (ID)=3A, Drain to Source Voltage (Vdss)=60V, Input Capacitance=708pF, Max Operating Temperature=150°C, Max Power Dissipation=1.2W, Min Operating Temperature=-55°C, Mount="Surface Mount", Packaging="Tape and Reel", Rds On Max=150mR
R1: library part CMP-2001-04908-2, "RES Thick Film, 10kΩ, 1%, 0.125W, 100ppm/°C, 0805", Case Code (Imperial)=0805, Case Code (Metric)=2012, Max Operating Temperature=155°C, Min Operating Temperature=-55°C, Package Quantity=5000, Power Rating=125mW, Resistance=10kR, Temperature Coefficient=100ppm/°C, Tolerance=1%, Voltage Rating=150V, Case/Package=0805, Composition="Thick Film", Contact Plating=Tin, Depth=1.25mm, Height=0.45mm, Lead Free="Lead Free", Length=2mm, Military Standard=Not, Packaging="Tape and Reel", Radiation Hardening=No, Termination=SMD/SMT, Voltage Rating (DC)=150V, Weight=0.000194oz, Width=1.25mm
R2: library part CMP-03412-037390-1, "RES SMD 120 OHM 5% 1/8W 0805", Manufacturer=Yageo, Manufacturer Part Number=AC0805JR-07120RL, Package=AC0805, Power Rating=1/8W, Resistance=120Ω, Temperature="-55°C to +155°C", Temperature Range High=+155°C, Temperature Range Low=-55°C, Tolerance=0.05, Voltage Rating=150V, Automotive=Yes, Automotive Grade="Grade 0", Category=Res, ComponentLink2Description=Datasheet, ComponentLink2URL=http://www.yageo.com/documents/recent/PYu-AC_51_RoHS_L_6.pdf, Composition="Thick Film", Device Class L1="Passive Components", Device Class L2=Resistors, Device Class L3="Chip SMD Resistors", Digikey Description="RES SMD 120 OHM 5% 1/8W 0805", Footprint Url=http://www.yageo.com/exep/pages/download/literatures/PYu-R_Mount_10.pdf, Height=0.6mm, Ipc Land Pattern Name=RESC200125X50, Lead Free=Yes, Mouser Description="Thick Film Resistors - SMD 1/8W 120ohm 5% AEC-Q200", Octopart=https://octopart.com/ac0805jr-07120rl-yageo-52448213, RoHS=TRUE, Series=AC
R3: library part CMP-2001-00362-1, Manufacturer=Panasonic, Part Number=ERJ-6GEYJ181V
R4: library part CMP-2001-04480-2, "RES SMD 10K OHM 1% 1/8W 0805", Manufacturer=Yageo, Manufacturer Part Number=AC0805FR-0710KL, Package=AC0805, Power Rating=1/8W, Resistance=10KΩ, Temperature="-55°C to +155°C", Temperature Range High=+155°C, Temperature Range Low=-55°C, Tolerance=0.01, Voltage Rating=150V, Automotive=Yes, Automotive Grade="Grade 0", Category=Res, ComponentLink2Description=Datasheet, ComponentLink2URL=http://www.yageo.com/documents/recent/PYu-AC_51_RoHS_L_6.pdf, Composition="Thick Film", Device Class L1="Passive Components", Device Class L2=Resistors, Device Class L3="Chip SMD Resistors", Digikey Description="RES SMD 10K OHM 1% 1/8W 0805", Footprint Url=http://www.yageo.com/exep/pages/download/literatures/PYu-R_Mount_10.pdf, Height=0.6mm, Ipc Land Pattern Name=RESC200125X50, Lead Free=Yes, Mouser Description="Res Thick Film 0805 10K Ohm 1% 0.125W(1/8W) ±100ppm/C Epoxy Pad SMD Automotive T/R", Octopart=https://octopart.com/ac0805fr-0710kl-yageo-21711112, RoHS=TRUE, Series=AC
R5 R6 R7 R8: library part CMP-07231-003557-1, "Thick Film Chip Resistors 0805 180Ω 0.125W 5% 200ppm/°C", Case Code (Imperial)=0805, Case Code (Metric)=2012, Max Operating Temperature=155°C, Min Operating Temperature=-55°C, Package Quantity=5000, Power Rating=125mW, Resistance=180R, Temperature Coefficient=200ppm/°C, Tolerance=5%, Voltage Rating=150V, Case/Package=0805, Composition="Thick Film", Contact Plating=Tin, Depth=1.25mm, Height=0.5mm, Length=2mm, Military Standard=Not, Mount="Surface Mount", Packaging="Tape and Reel", Radiation Hardening=No, Termination=SMD/SMT, Thickness=508um, Width=1.25mm
Radj: library part CMP-2001-00267-5, "Chip Resistor, 665 Ohm, +/- 1%, 0.125 W, -55 to 155 degC, 0805 (2012 Metric), RoHS, Tape and Reel", Manufacturer=Panasonic, Max Operating Temperature="155 degC", Min Operating Temperature="-55 degC", Package Quantity=5000, Voltage Rating="150 V", ComponentLink1Description="Manufacturer URL", ComponentLink1URL=http://www.panasonic.com/, ComponentLink2Description=Datasheet, ComponentLink2URL=http://industrial.panasonic.com/cdbs/www-data/pdf/RDA0000/AOA0000C86.pdf, DatasheetVersion=04/2015, Height="0.6 mm", Length="2 mm", Mount="Surface Mount", Mounting Technology="Surface Mount", PackageDescription="2-Pin Surface Mount Device, Body 2 x 1.25 mm", PackageReference=0805, Packaging="Tape and Reel", REACH SVHC=Unknown, RoHSCompliant=true
Rfb1: library part CMP-2001-04771-1, Manufacturer="Vishay Dale", Part Number=TNPW08053K32BEEN
Rfb2: library part CMP-1659-00013-4, "Chip Resistor, 10 KOhm, +/- 1%, 0.125 W, -55 to 155 degC, 0805 (2012 Metric), RoHS, Tape and Reel", Manufacturer=Yageo, Max Operating Temperature="155 degC", Min Operating Temperature="-55 degC", Package Quantity=5000, Voltage Rating="150 V", ComponentLink1Description="Manufacturer URL", ComponentLink1URL=http://www.yageo.com/, ComponentLink2Description=Datasheet, ComponentLink2URL=http://www.yageo.com/documents/recent/PYu-RC_Group_51_RoHS_L_04.pdf, DatasheetVersion="Rev. 4, 02/2016", Height="0.5 mm", Length="2 mm", Mount="Surface Mount", Mounting Technology="Surface Mount", PackageDescription="2-Pin Surface Mounted Device, Body 2 x 1.25 mm", PackageReference=0805, Packaging="Tape and Reel", Pins=2, REACH SVHC="No SVHC", RoHSCompliant=true
Rsns: library part CMP-2001-01428-1, Manufacturer=Yageo, Part Number=RL0805FR-070R01L
Rt: library part CMP-2001-03921-1, Manufacturer="Vishay Dale", Part Number=CRCW080544K2FKEA
SW1: library part CMP-05613-000006-1, "SWITCH PUSH SPST-NO 0.1A 14V", Contact Current Rating=100mA, Max Operating Temperature=80°C, Max Voltage Rating (DC)=14V, Min Operating Temperature=-30°C, Operating Force=4N, Package Quantity=1200, Actuator Length=5.5mm, Actuator Type=Lever, Current Rating=100mA, Lead Free="Lead Free", Mount="Through Hole", Orientation=Straight, Packaging=Bulk, Radiation Hardening=No, REACH SVHC="No SVHC", RoHS Compliant=Yes, Series=ESE20C, Switch Function=Off-Mom, Termination="PC Pin", Throw Configuration=SPST, Voltage Rating (DC)=14V
U1: library part CMP-0095-00015-2, "8-bit AVR Microcontroller, 32KB Flash, 1KB EEPROM, 2KB SRAM, 28-pin PDIP, Industrial Grade (-40°C to 85°C)", ComponentLink1Description="Manufacturer URL", ComponentLink1URL=http://www.atmel.com/, ComponentLink2Description="ATmega48A/48PA/88A/88PA/168A/168PA/328/328P Datasheet", ComponentLink2URL=http://www.atmel.com/dyn/resources/prod_documents/8271.pdf, ComponentLink3Description="ATmega48A/48PA/88A/88PA/168A/168PA/328/328P Summary", ComponentLink3URL=http://www.atmel.com/dyn/resources/prod_documents/8271S.pdf, DatasheetVersion="revD, May-2011", PackageDescription="28-lead (0.300\"/7.62mm Wide) Plastic Dual Inline Package (PDIP)", PackageReference=28P3, PackageVersion="revB, Sep-2001", RevisionNote="DatasheetVersion updated. URLs added."
U2: library part CMP-0248-00026-3, "IC USB SERIAL BASIC UART 16SSOP", Case/Package=SSOP, Max Operating Temperature=85°C, Max Supply Voltage=5.5V, Min Operating Temperature=-40°C, Min Supply Voltage=2.97V, Operating Supply Current=8mA, Operating Supply Voltage=5V, Package Quantity=3000, Data Rate=12Mbps, Height=0.059inch, Interface=UART, Length=5mm, Mount="Surface Mount", Number of Channels=1, Number of Pins=16, Packaging="Tape and Reel", Weight=0.004586oz, Width=0.157inch
U3: library part CMP-0244-00088-1, "Fixed Low Drop Positive Voltage Regulator, 3.3V, 3-Pin DPAK, Tape and Reel", ComponentLink1Description="Manufacturer URL", ComponentLink1URL=http://www.st.com, ComponentLink2Description=Datasheet, ComponentLink2URL=http://www.st.com/internet/com/TECHNICAL_RESOURCES/TECHNICAL_LITERATURE/DATASHEET/CD00000544.pdf, DatasheetVersion=1/11/2011, PackageDescription="3-Pin Transistor Outline Package 2.28 mm Pitch, 9.7 mm Lead Span (DPAK)", PackageReference=TO-252, PackageVersion=2011
U4: library part CMP-0063-01331-3, "42V Constant On-Time PFET Buck Switching Controller, 8-pin eMSOP, Pb-Free", Manufacturer="Texas Instruments", PackageTopMarking=ZXTT*SVYB, PowerWise=Y, Code_JEDEC=MO-187-AA, ComponentLink1Description="Datasheet URL", ComponentLink1URL=http://www.ti.com/general/docs/lit/getliterature.tsp?genericPartNumber=LM25085&fileType=pdf, CompType=MiscPower, PackageDescription="Molded Mini-SO, Exposed Pad, .118 x .118 x .034in Body, 8 Lead, .0256in Pitch", PackageReference=DGN0008A, PinCount=8, RoHS=Y
U5: library part CMP-0186-00138-3, "High-Speed CAN Transceiver, /  1 Mb/s, 4.5 to 5.5 V, 8-Pin SOIC (SN), Industrial Temperature, RoHS, Tube", Manufacturer=Microchip, ComponentLink1Description="Manufacturer URL", ComponentLink1URL=http://www.microchip.com/, ComponentLink2Description=Datasheet, ComponentLink2URL=http://ww1.microchip.com/downloads/en/DeviceDoc/21667f.pdf, ComponentLink3Description="Package Specification", ComponentLink3URL=http://www.microchip.com/stellent/groups/techpub_sg/documents/packagingspec/en012702.pdf, DatasheetVersion="Rev. F, 07/2010", Mounting Technology="Surface Mount", PackageDescription="8-Pin Small Outline Integrated Circuit, Body 4.9 x 3.9 mm, Pitch 1.27 mm", PackageReference=SN8, RoHSCompliant=true
U6: library part CMP-0186-00035-2, "Stand-Alone CAN Controller With SPI Interface, 18-Pin SOIC, Extended Temperature", Code_JEDEC=MS-013, ComponentLink1Description="Manufacturer URL", ComponentLink1URL=http://www.microchip.com/, ComponentLink2Description=Datasheet, ComponentLink2URL=http://ww1.microchip.com/downloads/en/DeviceDoc/21801f.pdf, ComponentLink3Description="Package Specification", ComponentLink3URL=http://www.microchip.com/stellent/groups/techpub_sg/documents/packagingspec/en012702.pdf, DatasheetVersion="revF, Oct-2010", PackageDescription="18-Lead Plastic Small Outline (SO) - Wide 7.50mm Body [SOIC]", PackageReference=SOIC-SO18, PackageVersion="revBB, Aug-2009", RevisionNote="URLs added. DatasheetVersion updated."
X1: library part CMP-1749-00001-1, "Resistance Weld SMD Crystal, 16 MHz, +/- 30 ppm, 20 pF, -20 to 70 degC, 2-Pin SMD, RoHS, Tape and Reel", Case\Package=SOT-553-6, Max Operating Temperature="150 degC", Max Supply Voltage="3.3 V", Max Supply Voltage (DC)="6 V", Min Operating Temperature="-55 degC", Min Supply Voltage="1.4 V", Min Supply Voltage (DC)="4 V", Output Current="3 mA", Package Quantity=1, ComponentLink1Description="Manufacturer URL", ComponentLink1URL=http://www.foxonline.com/, ComponentLink2Description=Datasheet, ComponentLink2URL=http://foxonline.com/pdfs/hc49sdlf.pdf, DatasheetVersion=Mar-15, Height="0.55 mm", Interface=I2C, Length="1.6 mm", Mount="Surface Mount", PackageDescription="2-Pin Surface Mount Device, Body 5 x 11.7 mm, Height 4.5 mm", PackageReference=FOX-FOXSDLF160-20, Packaging="Cut Tape", Pins=6, Radiation Hardening=No, REACH SVHC="No SVHC", RoHSCompliant=true, Weight="9.9E-05 oz", Width="1.2 mm"
X2: library part CMP-1774-00008-1, "SMD Seam Sealing Crystal, 20 MHz, +/- 30 ppm, 18 pF, -10 to 70 degC, 4-Pin SMD, RoHS, Tape and Reel", Case\Package=TO-236-3, Forward Current="200 mA", Forward Voltage="800 mV", Max Operating Temperature="125 degC", Max Power Dissipation="200 mW", Max Surge Current="600 mA", Min Operating Temperature="-65 degC", Package Quantity=3000, Peak Reverse Current="2 uA", ComponentLink1Description=Datasheet, ComponentLink1URL=http://www.txccorp.com/download/products/quartz_crystals/2015TXC_7B_19.pdf, DatasheetVersion=Jul-15, Element Configuration="Common Cathode", Elements=2, Height="0.8 mm", Length="1.7 mm", Mount="Surface Mount", PackageDescription="4-Pin Surface Mount Device, Body 5 x 3.2 mm, Pitch 3.7 mm", PackageReference=7B-4, Packaging="Tape and Reel", Pins=3, Radiation Hardening=No, REACH SVHC="No SVHC", Recovery Time="5 ns", RoHSCompliant=true, Width="0.85 mm"

## Free pads (board coordinates)
  round 196.85 hole 122.05: ""(160,2295) ""(216.54,216.54) ""(3645,160) ""(3730,2360)

## Via types
v1: diameter 50, hole 28, Top Layer to Bottom Layer, 29 vias
v2: diameter 15.75, hole 7.87, Top Layer to Bottom Layer, 4 vias
v3: diameter 100, hole 50, Top Layer to Bottom Layer, 2 vias
v4: diameter 28, hole 20, Top Layer to Bottom Layer, 2 vias
v5: diameter 28, hole 18, Top Layer to Bottom Layer, 2 vias

## Nets (pads, with @x,y where several pads share a name; then routed paths per layer and width w, separated by ;. In a path a pad name is that pad's centre, name@x,y a point inside that pad or via, vN(x,y) a via of type N, cw(c..) or ccw(c..) an arc to the next point about the centre after c; other vN are vias at no path point)
+3V3: C4.2 C5.2 C6.2 C7.2 C10.2 C11.2 C26.2 C27.2 C28.2 Power.1 R1.2 R2.1 R4.1 U1.7 U1.20 U3.4 U5.3 U5.5 U6.18 | length 4661.4
  Top Layer w30: v1(225,2125) 319.49,2219.49 319.49,2238.07 C4.2 ; U5.3 513.63,2260 563.63,2210 U5.5 708.27,2210 723.07,2224.8 752.36,2224.8 C6.2 C7.2 977.56,2232.44 v1(1040,2170) ; R1.2 1185,985 U1.7 ; C10.2 1057.57,2270 1040,2252.43 v1(1040,2170) ; v1(1425,1655) 1445,1635 1485,1635 1500,1620 C26.2 1552.43,1560 1570,1542.43 U1.20 ; v1(1464.87,2070.61) 1464.14,2071.34 R4.1 1237.4,2071.34 1236.06,2070 1212.44,2070 U6.18 1212.44,2081.34 C11.2 1209.94,2167.5 1042.5,2167.5 v1(1040,2170)
  Top Layer w70: Power.1 3230,281.01 ; v3(3270,85) 3010.55,85 3010.55,209.45 U3.4 3149.24,240 ; v3(3360,190) 3199.24,190 3149.24,240 ; R2.1 3318.99,370 3230,281.01 ; 3149.24,240 3188.99,240 3230,281.01
  Bottom Layer w30: v1(225,2125) 310,2210 310,2228.58 C5.2 ; v1(1270,1290) 1270.73,1290.73 1369.27,1290.73 C28.2 U1.7 ; C27.2 1497.56,1555.08 1564.44,1488.2 1564.44,1475.56 U1.20
+5: Cff.1 Cout.1 D2.2 D4.2 L1.2 Power.3 Rfb2.2 | length 4784.9
  Top Layer w20: Rfb2.2 3105,1940 3075,1910 3075,1776.72 3086.72,1765 Cff.1
  Top Layer w30: Power.3@3074.95,687.43 D2.2@3074.95,920
  Top Layer w70: D4.2 2212.52,474.19 2253.52,515.19 v1(2573.32,515.19) 2902.71,515.19 Power.3 Power.3@3074.95,687.43
  Top Layer w100: Cout.1 2573.32,840.38 v1(2573.32,515.19)
  Bottom Layer w100: v1(2573.32,515.19) 3521.42,515.19 3580,573.77 3580,1845 v1(3355,2070)
+5V: D5.2 D6.2 J1.1 LED1.2 R7.2 | length 3709.4
  Top Layer w20: v1(170,950) 170,1135 180,1145 ; 196.72,1405.54 180,1388.83 180,1145 ; J1.1 198.82,1406.18 185,1420 185,1585 216.5,1616.5 LED1.2 216.5,1738.78 247.72,1770 D6.2 ; R7.2 276.76,1081.98 243.02,1081.98 180,1145
  Top Layer w40: v1(2061.15,95.27) 2063.07,97.18 2194.7,97.18 D5.2
  Top Layer w100: v1(170,950) 170,645 480,335 1995,335 2061.15,268.85 v1(2061.15,95.27)
FB: Cff.2 Rfb1.2 Rfb2.1 U4.3 | length 78.5
  Top Layer w20: Cff.2 3320,1750 3320,1745 3321.06,1743.94 3321.06,1694.8 U4.3
GND: C1.1 C4.1 C5.1 C6.1 C7.1 C8.2 C9.1 C10.1 C11.1 C12.1 C26.1 C27.1 C28.1 C29.1 Cin.2 Cout.2 D1.1 D3.1 J1.5 J2.1 LED2.1 Power.2 R3.2 Rfb1.1 SW1.b SW1.d U1.8 U1.22 U2.5 U2.13 U3.1 U4.4 U5.2 U5.8 U6.9 X2.2 X2.4 | length 3997.4
  Top Layer w15: J1.5 268.28,1303.82 280,1292.1 280,1181.29 276.7,1177.98 276.7,1161.7 v1(270,1155) ; v4(395,1615) 395,1461.99 U2.13
  Top Layer w20: v1(420,1965) 428.12,1965 443.12,1980 643.28,1980 655,1968.28 655,1848.03 671.61,1831.42 X2.2 ; U2.5 422.5,1170.06 C29.1 ; v1(2640,325) 2642.38,327.38 2729.59,327.38 U3.1 ; v1(3140.53,1847.9) 3143.43,1845 Rfb1.1 ; v1@3151.26,807.37 v1(3149.89,808.74) 3158,808.74 3177.49,828.23 R3.2 ; v1(3205,1695) 3205.67,1694.33 3295.94,1694.33 U4.4 ; Cin.2 v1(3465,1625.16)
  Top Layer w30: 337.34,2401.93 337.34,2328.76 C4.1 C4.1@351.42,2310 ; C29.1 427.56,1162.44 430,1160 432.5,1162.5 517.5,1162.5 v1(520,1160) ; SW1.b 463.46,700.94 629.06,700.94 v1(630,700) 630.94,700.94 776.54,700.94 SW1.d ; C8.2@585,1584.49 X2.4 ; C8.2 597.52,1482.26 v1(600.17,1479.61) ; U5.8 742.43,2360 ; C6.1 760,2342.43 742.43,2360 ; C10.1 1305,2275 1305,2317.43 1287.43,2335 v1(1005,2335) 1000.89,2335 953.45,2287.56 C7.1 845,2342.43 827.43,2360 742.43,2360 ; U1.22 1375.56,1475.56 1375.56,1539.35 1393.13,1556.93 1439.84,1556.93 C26.1 ; v1(3764.08,473.15) 3776.85,473.15 D1.1
  Top Layer w40: Power.2 v1@3151.26,807.37
  GND w30: v1(630,700) v1@630.94,700.94 ; SW1.d@776.54,700.94 SW1.d
  Bottom Layer w20: C12.1 382.44,1600.28 395,1612.84 v4(395,1615)
  Bottom Layer w30: v1(250,2445) 253.83,2441.17 293.41,2441.17 335,2399.59 C5.1 ; C28.1 U1.22 1375.56,1475.56 1375.56,1488.2 1442.44,1555.08 C27.1 ; U1.8 C1.1 1567.48,1298.5 v1(1569.35,1300.37)
ISEN: Q1.2 Q1.4 Rsns.1 U4.5
NetC1_2: C1.2 U1.21 | length 108.5
  Bottom Layer w30: C1.2 U1.21
NetC2_1: C2.1 U1.9 | length 110
  Top Layer w30: C2.1 1535,1135 U1.9
NetC2_2: C2.2 X1.2 | length 256
  Top Layer w30: X1.2 1481.89,855 1506.26,879.37 1506.26,994.61 1527.13,1015.47 C2.2
NetC3_1: C3.1 U1.10 | length 100.4
  Top Layer w30: U1.10 1675,1165 1675,1078.23 1678.7,1074.53 C3.1
NetC3_2: C3.2 X1.1 | length 209.4
  Top Layer w30: C3.2 1687.87,1015.47 1691.57,1011.77 1691.57,1003.9 1762.8,932.67 1762.8,879.21 X1.1
NetC8_1: C8.1 U6.8 X2.1 | length 301
  Top Layer w20: C8.1 667.05,1574.57 667.05,1665.43 X2.1 671.61,1685.75 690.87,1705 786,1705 801,1720 U6.8
NetC9_2: C9.2 U6.7 X2.3 | length 415.7
  Top Layer w20: C9.2 587.52,1912.48 587.52,1818.19 X2.3 596.47,1804.2 596.47,1761.72 608.18,1750 779.45,1750 799.45,1770 U6.7
NetC12_2: C12.2 C29.2 R7.1 U2.3 U2.12 | length 405.4
  Top Layer w15: U2.12 422.5,1537.5 v4(455,1570)
  Top Layer w20: C29.2@372.44,1161.06 374.35,1159.15 374.35,1076.91 R7.1 ; C29.2@372.47,1165.03 U2.3
  Bottom Layer w20: C12.2 436.28,1491.28 436.28,1551.28 v4(455,1570)
NetCadj_2: Cadj.2 Radj.1 U4.1
NetCvcc_2: Cvcc.2 U4.7 | length 170.2
  Top Layer w20: U4.7 3347.8,1401.72 3359.51,1390 Cvcc.2
NetD1_2: D1.2 R2.2 | length 107.5
  Top Layer w30: R2.2 3720,368.66 3722.72,365.94 D1.2
NetD2_1: D2.1 R3.1 | length 132.7
  Top Layer w30: D2.1 3241.06,920 3256.06,905 R3.1
NetD3_2: D3.2 L1.1 Q1.3
NetD4_1: D4.1 D5.1 U3.3
NetD6_1: D6.1 R6.2 | length 181.9
  Top Layer w20: D6.1 109.92,1770 129.45,1789.53 129.45,1833.29 135.77,1839.61 v1(135.77,1847.73)
  Bottom Layer w20: R6.2 133.74,1845.69 v1(135.77,1847.73)
NetJ4_1: J4.1 U5.7
NetJ4_2: J4.2 U5.6
NetLED1_1: LED1.1 R5.2 | length 184
  Top Layer w20: v1(51.94,1655.77) 52.71,1655 LED1.1
  Bottom Layer w20: v1(51.94,1655.77) 52.33,1655.38 133.36,1655.38 R5.2
NetLED2_2: LED2.2 R8.2 | length 256.7
  Top Layer w30: v1(1180,790) 1180,784.59 1185,779.59 LED2.2@1185,661.5
  Bottom Layer w30: v1@1180,787.59 R8.2
NetQ1_1: Q1.1 U4.6 | length 235.5
  Top Layer w15: Q1.1 3275.55,1430.55 3322.2,1477.2 U4.6
NetR4_2: R4.2 U6.17 | length 171.9
  Top Layer w30: U6.17 1322.76,2020 1354.09,1988.66 R4.2
NetR5_1: R5.1 U2.15 | length 288.9
  Top Layer w15: v1(265,1545) 338.71,1545 347.5,1536.21 U2.15
  Bottom Layer w20: R5.1 226.26,1584.04 265,1545.3 v1(265,1545)
NetR6_1: R6.1 U2.14 | length 360.2
  Top Layer w15: 252.64,1770 252.64,1672.36 372.5,1552.5 U2.14
NetR8_1: R8.1 U1.5 | length 167.9
  Bottom Layer w30: U1.5 1170,1162.14 1180,1152.14 R8.1
NetRt_1: Rt.1 U4.2 | length 558.6
  Top Layer w20: U4.2 3347.8,1766.08 3361.72,1780 3743.28,1780 3755,1768.28 Rt.1
NetU1_16: U1.16 U6.16 | length 976
  Top Layer w20: U6.16 1201.31,1969.79 1260.21,1969.79 1290,1940 1500,1940 U1.16
NetU6_12: U6.12
PIN_1: Bootload.4 R1.1 SW1.a SW1.c U1.1 | length 3431.4
  Top Layer w20: SW1.a 770,938.11 SW1.c@773.74,941.85 ; U1.1 773.74,1166.26 SW1.c@773.74,941.85 ; R1.1 913.63,980 819.37,980 SW1.c SW1.c@773.74,941.85
  Top Layer w30: U1.1 770,1307.43 787.57,1325 2147.43,1325 2165,1342.57 2165,2250 Bootload.4
PIN_2: P1.10 U1.2 | length 1146.4
  Bottom Layer w30: U1.2 870,165 P1.10
PIN_3: P1.9 U1.3 | length 1146.4
  Bottom Layer w30: U1.3 970,165 P1.9
PIN_4: P1.8 U1.4 | length 1146.4
  Bottom Layer w30: U1.4 1070,165 P1.8
PIN_6: P1.7 U1.6 | length 1105
  Bottom Layer w30: P1.7 U1.6
PIN_11: P1.6 U1.11 | length 1270.7
  Bottom Layer w30: P1.6 1370,73.93 1386.5,90.42 1386.5,96.5 1570,280 1570,970 U1.11
PIN_12: P1.5 U1.12 | length 1270.7
  Bottom Layer w30: P1.5 1650,245 1650,950 U1.12
PIN_13: P1.4 U1.13 | length 1270.7
  Bottom Layer w30: P1.4 1725,220 1725,925 U1.13
PIN_14: P1.3 U1.14 | length 1270.7
  Bottom Layer w30: P1.3 1810,205 1810,910 U1.14